# Altium PCB EST_MainV20.PcbDoc (part 2 of 7)
Units mil, origin at the board's own origin, x right, y up, seen from the top; angles counter-clockwise.
Board outline 2745 x 4540 mil, 2 copper layers (Top Layer, Bottom Layer); 326 components, 241 nets, 1052 pads, 399 vias.
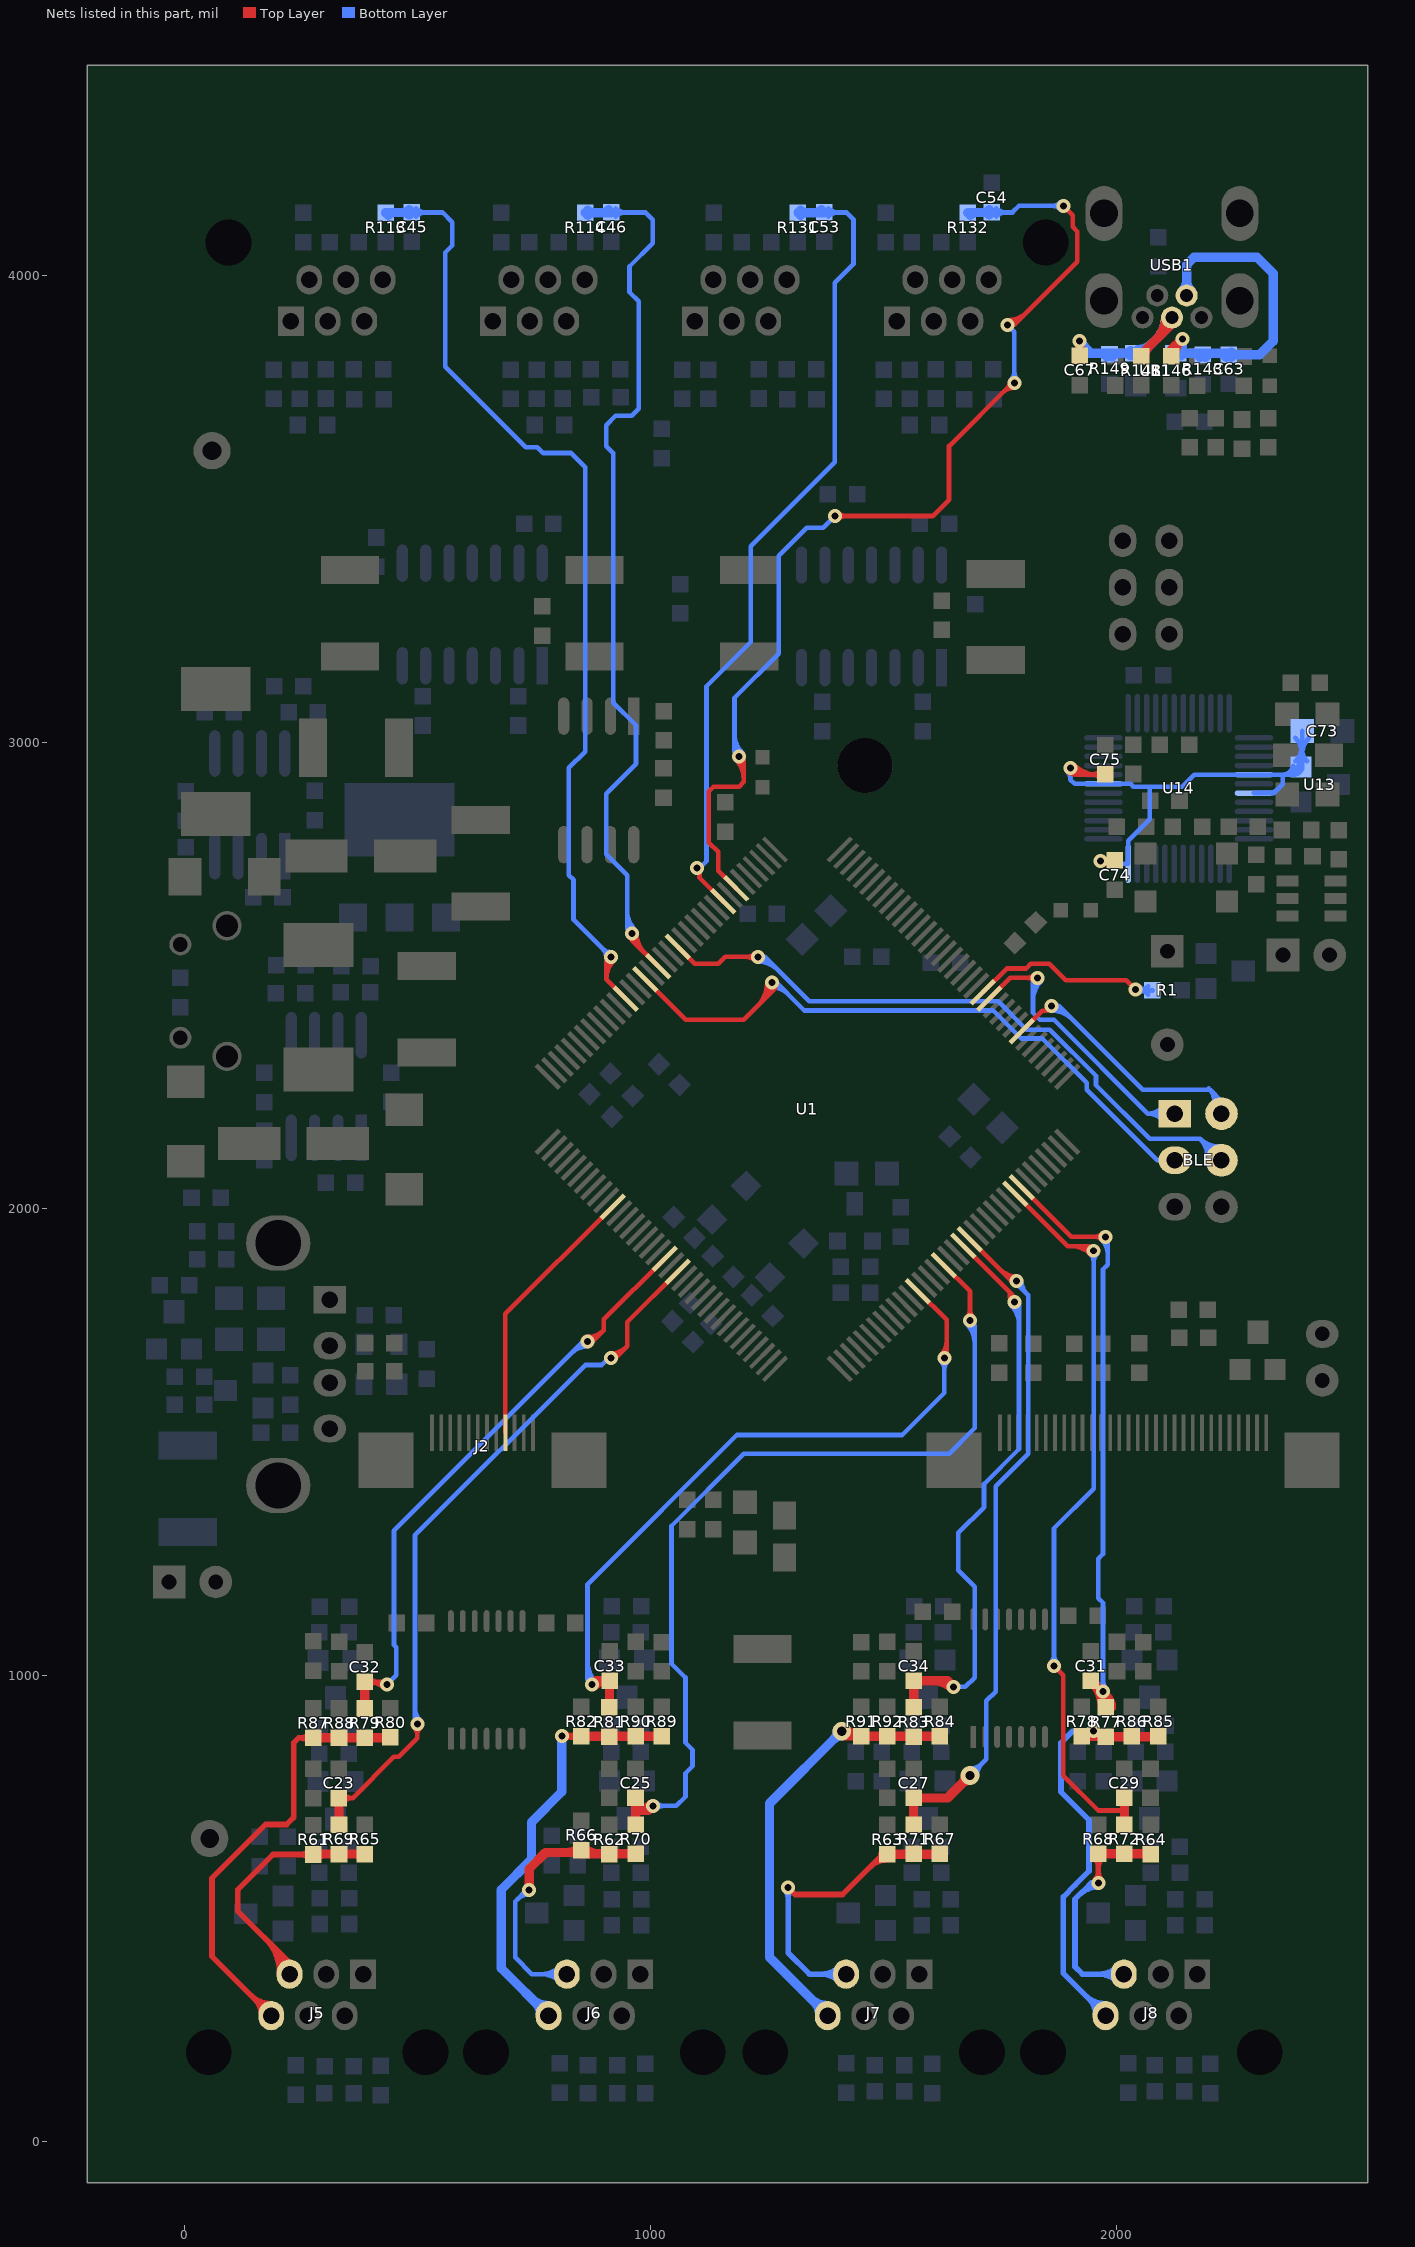
[diagram p2: the nets of this part, all layers, seen from the top]

## Via types
v1: diameter 30, hole 15, Top Layer to Bottom Layer, 237 vias
v2: diameter 50, hole 25, Top Layer to Bottom Layer, 93 vias
v3: diameter 40, hole 20, Top Layer to Bottom Layer, 68 vias
v4: diameter 60, hole 25, Top Layer to Bottom Layer, 1 vias

## Nets (pads, with @x,y where several pads share a name; then routed paths per layer and width w, separated by ;. In a path a pad name is that pad's centre, name@x,y a point inside that pad or via, vN(x,y) a via of type N, cw(c..) or ccw(c..) an arc to the next point about the centre after c; other vN are vias at no path point) (continued)
BELL: R1.2 U1.86 | length 586.1
  Top Layer w10: U1.86@1712.33,2463.91 1763.42,2515 1805,2515 1815,2525 1855,2525 1890,2490 2020,2490 v1(2040,2470)
  Bottom Layer w10: v1@2042.02,2467.98 R1.2@2076.01,2467.98 v1@2052.98,2467.98 ; R1.2@2065.24,2461.21 ccw(c2052.98,2453.5) v1@2052.98,2467.98 ; R1.2@2065.24,2474.76 cw(c2052.98,2482.47) v1@2052.98,2467.98 ; R1.2@2067.02,2458.99 ccw(c2045.31,2437.28) 2045.31,2467.98 ccw(c2045.31,2498.68) R1.2@2067.02,2476.98 ; v1@2047.07,2462.93 cw(c2059.28,2450.72) 2059.28,2467.98 ccw(c2059.28,2450.72) v1@2047.07,2462.93 ; v1@2047.07,2477.07 ccw(c2069.01,2499.01) 2069.01,2467.98 cw(c2069.01,2499.01) v1@2047.07,2477.07
BLE_IO1: BLE.2 U1.80 | length 731
  Top Layer w10: U1.80@1795.85,2380.4 1840.23,2424.77 1849.77,2424.77 v1(1860,2435)
  Bottom Layer w10: v1@1860,2425 cw(c1860,2364.64) 1902.68,2407.32 ; 1885.61,2424.39 ccw(c1860,2398.79) v1(1860,2435) 1875,2435 2055,2255 2200,2255 2224,2231 BLE.2@2224,2204 ; 2196.89,2258.11 cw(c2167.38,2228.6) BLE.2@2205.66,2211.97 ; 2207.28,2247.72 cw(c2181.86,2222.31) BLE.2@2214.83,2207.98
BLE_IO2: BLE.1 U1.85 | length 827.9
  Top Layer w10: U1.85@1726.25,2449.99 1771.26,2495 v1(1830,2495) ; v1@1822.93,2487.93 ccw(c1805.86,2470.86) 1805.86,2495 ccw(c1805.86,2519.14) v1@1822.93,2502.07
  Bottom Layer w10: 1820,2446.72 cw(c1878.28,2446.72) v1@1837.07,2487.93 ; 1820,2470.86 cw(c1854.14,2470.86) v1(1830,2495) 1820,2485 1820,2420 1835,2405 1865,2405 2066,2204 ; BLE.1@2099.72,2188.25 ccw(c2066,2160.02) 2066,2204 ; BLE.1@2099.72,2219.75 cw(c2066,2247.98) 2066,2204 ; BLE.1@2107.39,2194.67 ccw(c2087.42,2177.95) 2087.42,2204 ccw(c2087.42,2230.05) BLE.1@2107.39,2213.33 ; BLE.1@2124,2204 2066,2204
BLE_RX: BLE.4 U1.124 | length 1653.2
  Top Layer w10: U1.124@1058.12,2561.35 1094.47,2525 1145,2525 1160,2540 v1(1230,2540) ; v1@1222.93,2532.93 ccw(c1205.86,2515.86) 1205.86,2540 ccw(c1205.86,2564.14) v1@1222.93,2547.07
  Bottom Layer w10: v1@1230,2530 cw(c1230,2469.64) 1272.68,2512.32 ; 1255.61,2529.39 ccw(c1230,2503.79) v1(1230,2540) 1245,2540 1340,2445 1745,2445 1806,2384 1856,2384 1955,2285 1955,2265 2070,2150 2178,2150 ; BLE.4@2194.09,2106.36 ccw(c2138.74,2110.73) 2178,2150 ; BLE.4@2204.06,2105.57 ccw(c2167.16,2108.49) 2193.33,2134.67 ccw(c2219.51,2160.84) BLE.4@2222.43,2123.94 ; BLE.4@2221.64,2133.91 cw(c2217.27,2189.26) 2178,2150 ; BLE.4@2224,2104 2178,2150
BLE_TX: BLE.3 U1.129 | length 1557.7
  Top Layer w10: U1.129@988.52,2491.75 1075.28,2405 1200,2405 1260,2465 v1(1260,2485) cw(c1211.72,2485) 1245.86,2450.86 ; 1228.79,2433.79 ccw(c1177.57,2485) v1@1250,2485 ; 1262.93,2467.93 ccw(c1245.86,2485) v1@1270,2485
  Bottom Layer w10: v1@1260,2475 cw(c1260,2426.72) 1294.14,2460.86 ; v1(1260,2485) cw(c1260,2460.86) 1277.07,2477.93 ; v1@1260,2495 1330,2425 1735,2425 1795,2365 1840,2365 1935,2270 1935,2255 2086,2104 BLE.3@2124,2104
BLUE: J2.4 U1.11 | length 579.8
  Top Layer w10: J2.4@688.94,1520 688.94,1774.59 U1.11@918.93,2004.57
CVDD: C73.1 C74.2 C75.2 U13.1 U14.5 U14.7 U14.24 U14.31 | length 1647.5
  Top Layer w10: v1@1892.93,2937.93 ccw(c1909.36,2954.36) 1909.36,2931.12 ; v1@1907.07,2952.07 ccw(c1957.64,3002.64) C75.2@1957.64,2931.12 ; 1933.5,2931.12 cw(c1933.5,2978.5) v1(1900,2945) 1913.88,2931.12 C75.2@1975.16,2931.12 ; v1(1965,2745) v1@1966.88,2746.88 ; C75.2@1966.17,2922.13 ccw(c1944.46,2900.42) 1944.46,2931.12 ccw(c1944.46,2961.83) C75.2@1966.17,2940.12 ; v1@1972.07,2737.93 cw(c1993.67,2716.33) C74.2@1993.67,2746.88 ; v1@1972.07,2752.07 ccw(c1984.62,2764.62) C74.2@1984.62,2746.88 ; C74.2@1985.26,2738.52 ccw(c1966.88,2722.48) v1@1966.88,2746.88 ; C74.2@1985.26,2755.23 cw(c1966.88,2771.27) v1@1966.88,2746.88 ; C74.2@1994.84,2746.88 v1@1966.88,2746.88
  Bottom Layer w10: v1@1892.93,2937.93 cw(c1875.86,2920.86) 1900,2920.86 cw(c1924.14,2920.86) v1@1907.07,2937.93 ; v1(1900,2945) 1900,2920 1909.17,2910.83 U14.31@1970.91,2910.83 2029.17,2910.83 2035,2905 2070,2905 ; v1(1965,2745) 1970,2740 1975,2740 1975.43,2739.57 U14.24@2024.06,2739.57 2024.06,2789.06 2070,2835 2070,2905 ; v1@1972.07,2752.07 ccw(c2002.24,2782.24) 2002.24,2739.57 ; U14.7@2293.74,2891.15 2336.15,2891.15 2355,2910 2355,2930.52 ; U14.7@2329.17,2892.06 ccw(c2329.17,2911.08) 2342.63,2897.63 ; 2366.77,2930.52 ccw(c2366.77,2951.62) U13.1@2387.6,2948.21 ; U13.1@2377.73,2949.83 cw(c2355,2953.55) 2355,2930.52 ; U13.1@2378.54,2930.52 ccw(c2378.54,2949.7) U13.1@2397.47,2946.6 ; C73.1@2382.5,3009.5 cw(c2347.35,2974.35) 2397.05,2974.35 cw(c2446.76,2974.35) C73.1@2411.61,3009.5 ; U13.1@2382.63,2959.37 ccw(c2347.79,2994.21) 2397.06,2994.21 ; U13.1@2389.7,2952.3 ccw(c2371.93,2970.07) 2397.05,2970.07 ; 2397.05,2984.29 ccw(c2432.29,2984.29) U13.1@2407.37,2959.37 ; C73.1@2397.05,3024.06 2397.05,2949.06 U13.1@2395,2947 2378.52,2930.52 2355,2930.52 ; 2070,2905 2140,2905 2165.52,2930.52 U14.5@2293.74,2930.52 2355,2930.52
D+: C67.2 R148.2 R149.2 U11.2 USB1.3 | length 672.5
  Top Layer w20: C67.2@1914.39,3834.06 ccw(c1900.83,3847.62) v1@1920,3847.62 ; C67.2@1919.84,3828.61 1920,3828.76 v1(1920,3860) ; v1@1920,3846.86 ccw(c1938.09,3846.86) C67.2@1925.3,3834.06 ; R148.2@2052.02,3827.99 2052.02,3832.02 2117.87,3897.87 USB1.3@2117.87,3910.5 ; R148.2@2059.73,3827.99 cw(c2088.08,3827.99) 2068.03,3848.03 ; 2085.69,3865.69 ccw(c2040.88,3910.5) USB1.3@2104.25,3910.5
  Bottom Layer w20: 1920,3840.03 1928.16,3831.88 1930.28,3834 1945,3834 ; v1(1920,3860) 1920,3859 1945,3834 ; 1960.51,3834 cw(c1960.51,3808.52) R149.2@1978.53,3826.54 ; R149.2@1989.44,3826.54 cw(c2007.46,3808.52) 2007.46,3834 ; U11.2@2029.34,3828.34 ccw(c2015.69,3814.69) 2015.69,3834 ccw(c2015.69,3853.31) U11.2@2029.34,3839.66 ; U11.2@2045,3842 ccw(c2045,3883.04) 2074.02,3854.02 ; 2085.69,3865.69 ccw(c2040.88,3910.5) USB1.3@2104.25,3910.5 ; USB1.3@2117.87,3910.5 2117.87,3897.87 2054,3834 U11.2@2040,3834 1945,3834
D-: C63.1 R143.1 R146.2 U11.3 USB1.2 | length 992.6
  Top Layer w20: R146.2@2116.02,3827.99 2116.02,3841.02 v1(2140,3865) ; R146.2@2123.73,3827.99 cw(c2173.8,3827.99) v1@2138.4,3863.4
  Bottom Layer w20: U11.3@2126.7,3840.75 ccw(c2111.24,3865) v1(2140,3865) 2140,3848 U11.3@2126,3834 2236.96,3834 C63.1@2239.84,3831.12 2306.12,3831.12 2335,3860 2335,4005 2300,4040 2165,4040 2149.37,4024.37 USB1.2@2149.37,3957.74 ; U11.3@2134.5,3842.5 ccw(c2123.88,3853.12) v1@2135.97,3862.03 ; U11.3@2136.66,3828.34 cw(c2150.31,3814.69) 2150.31,3834 cw(c2150.31,3853.31) U11.3@2136.66,3839.66 ; USB1.2@2139.74,3967.38 ccw(c2116.48,3990.63) 2149.37,3990.63 ccw(c2182.26,3990.63) USB1.2@2159,3967.38 ; 2158.14,3834 cw(c2158.14,3805.13) R143.1@2178.56,3825.54 ; R143.1@2189.47,3825.54 cw(c2209.89,3805.13) 2209.89,3834 ; 2214.26,3834 cw(c2214.26,3805.53) C63.1@2234.39,3825.66 ; C63.1@2245.3,3825.66 cw(c2258.47,3812.49) 2258.47,3831.12 cw(c2258.47,3849.75) C63.1@2245.3,3836.57
DIGIA0: C23.1 R69.2 U1.21 | length 1774.5
  Top Layer w10: C23.1@332.03,737.03 C23.1@332.03,736.6 361.6,736.6 ; C23.1@341.26,727.86 cw(c361.6,708.58) 361.6,736.6 ; C23.1@341.26,745.35 ccw(c361.6,764.62) 361.6,736.6 ; v1@492.93,887.93 cw(c475.86,870.86) 500,870.86 cw(c524.14,870.86) v1@507.07,887.93 ; v1(500,895) 500,865 460,825 450,825 361.6,736.6 ; v1@915,1690 ccw(c915,1738.28) 949.14,1704.14 ; 932.07,1687.07 cw(c915,1704.14) v1(915,1680) 925,1680 950,1705 950,1757.26 U1.21@1058.12,1865.38
  Top Layer w20: C23.1@326.57,731.15 cw(c312.98,717.56) 332.2,717.56 ; R69.2@326.75,685.17 ccw(c313.57,698.34) 332.2,698.34 ccw(c350.83,698.34) R69.2@337.66,685.17 ; R69.2@332.2,679.71 C23.1@332.2,736.43 ; 332.2,718.39 cw(c350.24,718.39) C23.1@337.49,731.15
  Bottom Layer w10: 495,931.21 ccw(c536.21,931.21) v1@507.07,902.07 ; v1(500,895) 495,900 495,1300 860,1665 895,1665 910,1680 v1(915,1680)
DIGIA1: C32.2 R79.1 U1.19 | length 1563.5
  Top Layer w10: C32.2@387.35,985.85 429.16,985.85 v1(435,980) ccw(c420.89,965.89) 420.89,985.85 ; C32.2@396.34,976.85 cw(c418.05,955.14) 418.05,985.85 cw(c418.05,1016.55) C32.2@396.34,994.84 ; C32.2@396.75,985.85 cw(c396.75,941.75) v1@427.93,972.93 ; v1@865,1725 ccw(c865,1773.28) 899.14,1739.14 ; 882.07,1722.07 cw(c865,1739.14) v1(865,1715) 875,1715 900,1740 900,1762.94 U1.19@1030.28,1893.22
  Top Layer w20: R79.1@381.72,934.18 ccw(c368.54,947.35) 387.17,947.35 ccw(c405.8,947.35) R79.1@392.63,934.18 ; C32.2@381.89,980.39 cw(c369.13,967.63) 387.17,967.63 ; R79.1@387.17,928.72 C32.2@387.17,985.67 ; 387.17,966.8 cw(c406.39,966.8) C32.2@392.8,980.39
  Bottom Layer w10: v1(435,980) 455,1000 455,1060 450,1065 450,1310 855,1715 v1(865,1715) ; 830.86,1690.86 cw(c865,1656.72) v1@865,1705 ; 847.93,1707.93 cw(c865,1690.86) v1(865,1715) ; v1@875,1715 v1(865,1715)
DIGIAI0: J5.5 R61.2 R65.1 R69.1 | length 850.8
  Top Layer w12: 174.82,435.18 cw(c102.78,363.14) J5.5@204.66,363.14 ; 195.3,414.7 cw(c143.75,363.14) J5.5@216.66,363.14 ; 215.79,394.21 cw(c184.72,363.14) J5.5@228.66,363.14 ; J5.5@226.22,359.2 226.22,383.78 115,495 115,540 190.73,615.73 R61.2@277.17,615.73 ; R61.2@268.89,607.44 ccw(c248.89,587.44) 248.89,615.73 ccw(c248.89,644.01) R61.2@268.89,624.01
  Top Layer w20: R61.2@278.16,616.72 R69.1@332.2,616.72 R65.1@387.2,616.72 ; R61.2@282.63,610.27 cw(c298.2,594.7) 298.2,616.72 ; R69.1@326.75,611.26 ccw(c313.57,598.09) 313.57,616.72 ccw(c313.57,635.35) R69.1@326.75,622.18 ; R69.1@337.66,611.26 cw(c350.83,598.09) 350.83,616.72 cw(c350.83,635.35) R69.1@337.66,622.18 ; R65.1@381.75,611.26 ccw(c368.57,598.09) 368.57,616.72 ccw(c368.57,635.35) R65.1@381.75,622.18
DIGIAI1: J5.6 R79.2 R80.1 R87.1 R88.1 | length 1294.7
  Top Layer w12: 60,402.31 60,420 ; 60,560 60,545 ; 143.33,313.98 ccw(c186.85,357.51) J5.6@186.85,295.96 ; 152.83,304.48 cw(c122.75,274.4) J5.6@165.29,274.4 ; 163.81,293.5 ccw(c186.85,316.54) J5.6@186.85,283.96 ; J5.6@186.85,270.46 60,397.31 60,420 ; R87.1@268.94,857.44 ccw(c248.93,837.43) 248.93,865.72 ccw(c248.93,894.01) R87.1@268.94,874 ; R87.1@277.22,865.72 245.72,865.72 235,855 235,695 220,680 175,680 60,565 60,545 ; 60,420 60,490 60,545
  Top Layer w20: R87.1@277.22,865.72 R88.1@332.22,865.72 R80.1@441.2,865.72 ; R87.1@282.68,860.26 cw(c295.85,847.09) 295.85,865.72 cw(c295.85,884.35) R87.1@282.68,871.18 ; R88.1@326.76,860.26 ccw(c313.59,847.09) 313.59,865.72 ccw(c313.59,884.35) R88.1@326.76,871.18 ; R88.1@337.68,860.26 cw(c350.85,847.09) 350.85,865.72 cw(c350.85,884.35) R88.1@337.68,871.18 ; R79.2@381.72,860.27 ccw(c368.55,847.1) 368.54,865.73 ccw(c368.54,884.35) R79.2@381.71,871.18 ; R79.2@392.63,860.27 cw(c405.8,847.1) 405.8,865.73 cw(c405.8,884.35) R79.2@392.63,871.18 ; 421.16,865.72 ccw(c421.16,887.76) R80.1@436.75,872.18
DIGIB0: C25.1 R70.2 U1.53 | length 2225.9
  Top Layer w10: U1.53@1628.82,1879.3 1685,1823.11 v1(1685,1760) ; v1@1677.93,1767.07 ccw(c1660.86,1784.14) 1685,1784.14 ccw(c1709.14,1784.14) v1@1692.07,1767.07
  Top Layer w20: R70.2@962.56,685.45 ccw(c949.8,698.2) 967.84,698.2 ; R70.2@967.84,680.16 967.84,710 ; 967.84,699.04 ccw(c987.06,699.04) R70.2@973.47,685.45 ; C25.1@967.84,736.88 967.84,710 ; 968.79,710 ccw(c968.79,756.21) v1@1001.46,723.54 ; v1(1005,720) 995,710 967.84,710 ; C25.1@962.39,731.43 cw(c949.21,718.25) 967.84,718.25 ; C25.1@962.39,731.43 cw(c949.21,718.25) 967.84,718.25 ; C25.1@962.39,731.43 cw(c949.21,718.25) 967.84,718.25 ; C25.1@962.39,731.43 cw(c949.21,718.25) 967.84,718.25 ; 967.84,718.25 cw(c986.47,718.25) C25.1@973.3,731.43 ; 967.84,718.25 cw(c986.47,718.25) C25.1@973.3,731.43 ; 967.84,718.25 cw(c986.47,718.25) C25.1@973.3,731.43 ; 967.84,718.25 cw(c986.47,718.25) C25.1@973.3,731.43
  Bottom Layer w10: v1(1005,720) 1055,720 1075,740 1075,790 1090,805 1090,840 1075,855 1075,995 1045,1025 1045,1320 1200,1475 1640,1475 1695,1530 1695,1750 v1(1685,1760) cw(c1660.86,1735.86) 1695,1735.86 ; v1@1012.07,712.93 cw(c1029.14,695.86) 1029.14,720 cw(c1029.14,744.14) v1@1012.07,727.07 ; v1@1677.93,1752.93 cw(c1636.72,1711.72) 1695,1711.72
DIGIB1: C33.2 R81.1 U1.49 | length 1759.9
  Top Layer w10: U1.49@1573.14,1823.62 1635,1761.76 1635,1685 v1(1630,1680) ; v1@1622.93,1687.07 ccw(c1593.79,1716.21) 1635,1716.21
  Top Layer w20: v1(875,980) 883.12,988.12 C33.2@912.16,988.12 912.16,931.17 R81.1@911.98,931 ; v1@878.54,976.46 cw(c906.69,948.31) C33.2@906.69,988.12 ; R81.1@906.53,936.46 ccw(c892.94,950.05) 912.16,950.05 ; C33.2@906.7,993.58 cw(c893.53,1006.75) 893.53,988.12 cw(c893.53,969.5) 906.7,982.67 cw(c893.53,969.5) 912.16,969.5 cw(c930.79,969.5) C33.2@917.61,982.67 ; 912.16,949.21 ccw(c930.2,949.21) R81.1@917.44,936.46
  Bottom Layer w10: 865,1004.14 ccw(c899.14,1004.14) v1(875,980) 865,990 865,1195 1185,1515 1540,1515 1630,1605 v1(1630,1680) ; 865,1028.28 ccw(c923.28,1028.28) v1@882.07,987.07 ; v1@1622.93,1672.93 cw(c1605.86,1655.86) 1630,1655.86 cw(c1654.14,1655.86) v1@1637.07,1672.93
DIGIBI0: J6.5 R62.2 R66.1 R70.1 | length 871.9
  Top Layer w20: v1(740,540) 740,585 775,620 847.02,620 R66.1@852.02,625 ; 821.32,620 ccw(c821.32,655.7) R66.1@846.56,630.46 ; R66.1@856.02,617 R70.1@968.02,617 ; R66.1@857.47,630.46 ccw(c889.96,662.94) 889.96,617 ; 890.96,617 cw(c890.96,594.98) R62.2@906.53,610.55 ; R62.2@910.99,617 R62.2@911.98,616.01 ; R62.2@917.44,610.55 cw(c933.01,594.98) 933.01,617 ; R70.1@962.56,611.54 ccw(c949.39,598.37) 949.39,617 ccw(c949.39,635.63) R70.1@962.56,622.46
  Bottom Layer w10: 714.39,519.39 cw(c740,493.79) v1@740,530 ; 726.46,531.46 ccw(c717.93,540) v1@730,540 ; v1(740,540) 735,540 710,515 710,395 745.8,359.2 J6.5@820.71,359.2 ; J6.5@804.76,343.25 ccw(c766.25,304.74) 766.25,359.2 ccw(c766.25,413.66) J6.5@804.76,375.15 ; J6.5@811.83,350.32 ccw(c790.39,328.88) 790.39,359.2 ccw(c790.39,389.52) J6.5@811.83,368.08
DIGIBI1: J6.6 R81.2 R82.1 R89.1 R90.1 | length 1206.4
  Top Layer w14: v1(810,870) 811,869 825,869 ; v1@815.66,864.34 cw(c826.9,853.1) 826.9,869 ; v1@815.66,875.66 ccw(c831.73,891.73) 831.73,869 ; v1@819,869 825,869 ; R82.1@844.44,861.42 ccw(c826.14,843.13) 826.14,869 ccw(c826.14,894.87) R82.1@844.44,876.58 ; R82.1@852.02,869 825,869
  Top Layer w20: R82.1@852.02,869 R90.1@968.02,869 R89.1@1024.02,869 ; R82.1@857.47,863.54 cw(c870.65,850.37) 870.65,869 cw(c870.65,887.63) R82.1@857.47,874.46 ; 890.96,869 cw(c890.96,846.98) R81.2@906.53,862.55 ; R81.2@910.99,869 R81.2@911.98,868.01 ; R81.2@917.44,862.55 cw(c933.01,846.98) 933.01,869 ; R90.1@962.56,863.54 ccw(c949.39,850.37) 949.39,869 ccw(c949.39,887.63) R90.1@962.56,874.46 ; R90.1@973.47,863.54 cw(c986.65,850.37) 986.65,869 cw(c986.65,887.63) R90.1@973.47,874.46 ; R89.1@1018.56,863.54 ccw(c1005.39,850.37) 1005.39,869 ccw(c1005.39,887.63) R89.1@1018.56,874.46
  Bottom Layer w20: 744.64,307.16 ccw(c781.34,343.85) J6.6@781.34,291.96 ; 754.15,297.65 cw(c730.89,274.4) J6.6@763.78,274.4 ; J6.6@781.34,270.46 680,371.8 680,540 745,605 745,685 810,750 v1(810,870)
DIGIC0: C27.1 R71.2 U1.57 | length 1739.4
  Top Layer w10: U1.57@1684.49,1934.98 1774.47,1845 v1(1785,1845) cw(c1785,1870.42) 1767.02,1852.45 ; 1749.95,1869.52 ccw(c1785,1904.57) v1@1785,1855
  Top Layer w20: C27.1@1558.39,731.43 cw(c1545.21,718.25) 1563.84,718.25 cw(c1582.47,718.25) 1569.3,731.43 cw(c1582.47,718.25) 1582.47,736.88 cw(c1582.47,755.51) C27.1@1569.3,742.34 ; R71.2@1558.56,685.45 ccw(c1545.8,698.2) 1563.84,698.2 ; 1563.84,699.04 ccw(c1583.06,699.04) R71.2@1569.47,685.45 ; R71.2@1564.02,679.99 1563.84,680.16 C27.1@1563.84,736.88 1636.88,736.88 v3(1685,785) ; v3@1675,785 cw(c1650.86,785) 1667.93,767.93 cw(c1685,750.86) v3@1685,775
  Bottom Layer w10: v3(1685,785) 1720,820 1720,945 1740,965 1740,1405 1810,1475 1810,1815 v1@1780,1845 ; v3@1685,800 ccw(c1685,836.21) 1710.61,810.61 ccw(c1736.21,785) v3@1700,785 ; v1@1785,1835 cw(c1785,1822.93) 1793.54,1831.46 ; v1@1795,1845 ccw(c1831.21,1845) 1805.61,1819.39
DIGIC1: C34.2 R83.1 U1.56 | length 1475.9
  Top Layer w10: U1.56@1670.57,1921.06 1670.57,1920.57 1770.09,1821.06 1770.57,1821.06 ; v1@1775,1810 1775,1816.63 1770.57,1821.06 ; v1(1780,1800) 1770.57,1809.43 1770.57,1821.06
  Top Layer w20: R83.1@1558.53,936.46 ccw(c1545.35,949.63) 1563.98,949.63 ccw(c1582.61,949.63) R83.1@1569.44,936.46 ; C34.2@1558.7,982.67 cw(c1545.95,969.91) 1563.98,969.91 ; R83.1@1563.98,931 1563.98,987.95 C34.2@1564.16,988.12 1636.88,988.12 v1(1650,975) ; 1563.98,969.08 cw(c1583.2,969.08) 1569.61,982.67 cw(c1582.79,969.5) 1582.79,988.12 cw(c1582.79,1006.75) C34.2@1569.61,993.58 ; 1606.24,988.12 cw(c1606.24,931.24) v1@1646.46,971.46
  Bottom Layer w10: v1(1650,975) 1675,975 1695,995 1695,1190 1660,1225 1660,1305 1715,1360 1715,1410 1790,1485 1790,1795 v1@1775,1810 ; v1@1772.93,1792.93 cw(c1731.72,1751.72) 1790,1751.72 ; v1(1780,1800) cw(c1755.86,1775.86) 1790,1775.86
DIGICI0: J7.5 R63.2 R67.1 R71.1 | length 910.1
  Top Layer w12: v1(1295,545) 1310,530 1411.54,530 R63.2@1497.54,616.01 ; 1470.16,588.62 cw(c1507.98,550.8) R63.2@1507.98,604.29 ; R63.2@1490.64,609.11 cw(c1507.98,591.77) R63.2@1507.98,616.29
  Top Layer w20: R63.2@1497.54,616.01 R63.2@1507.98,616.01 1619.02,616.01 R67.1@1620.02,617 ; R63.2@1513.44,610.55 cw(c1526.61,597.38) 1526.61,616.01 cw(c1526.61,634.64) R63.2@1513.44,621.46 ; 1542.99,616.01 ccw(c1542.99,638.02) R71.1@1558.56,622.46 ; R71.1@1563.02,616.01 R71.1@1564.02,617 ; R71.1@1569.47,622.46 ccw(c1585.04,638.02) 1585.04,616.01 ; 1598.99,616.01 ccw(c1598.99,638.02) R67.1@1614.56,622.46
  Bottom Layer w12: v1@1288.64,538.64 cw(c1273.27,523.27) 1295,523.27 cw(c1316.73,523.27) v1@1301.36,538.64 ; v1(1295,545) 1295,405 1340.8,359.2 J7.5@1419.13,359.2 ; J7.5@1403.89,343.96 ccw(c1367.09,307.15) 1367.09,359.2 ccw(c1367.09,411.25) J7.5@1403.89,374.44
DIGICI1: J7.6 R83.2 R84.1 R91.1 R92.1 | length 1256.6
  Top Layer w20: v3@1405,880 1415,870 R91.1@1451.02,870 ; v3@1417.88,886.16 ccw(c1451.01,912.05) R91.1@1451.01,870 ; 1430.97,870 cw(c1430.97,847.96) R91.1@1446.56,863.54 ; R91.1@1457.47,863.54 cw(c1470.65,850.37) 1470.65,869 cw(c1470.65,887.63) R91.1@1457.47,874.46 ; R92.1@1502.56,863.54 ccw(c1489.39,850.37) 1489.39,869 ccw(c1489.39,887.63) R92.1@1502.56,874.46 ; R92.1@1513.47,863.54 cw(c1526.65,850.37) 1526.65,869 cw(c1526.65,887.63) R92.1@1513.47,874.46 ; 1542.96,869 cw(c1542.96,846.98) R83.2@1558.53,862.55 ; R83.2@1569.44,862.55 cw(c1585.01,846.98) 1585.01,869 ; R84.1@1614.56,863.54 ccw(c1601.39,850.37) 1601.39,869 ccw(c1601.39,887.63) R84.1@1614.56,874.46 ; R84.1@1620.02,869 R92.1@1508.02,869 R91.1@1452.02,869 R91.1@1451.02,870
  Bottom Layer w20: 1343.07,307.16 ccw(c1379.76,343.85) J7.6@1379.76,291.96 ; 1352.57,297.65 cw(c1329.32,274.4) J7.6@1362.2,274.4 ; J7.6@1379.76,270.46 1255,395.22 1255,725 v3(1410,880) ; v3@1400,880 cw(c1375.86,880) 1392.93,862.93 cw(c1410,845.86) v3@1410,870
DIGID0: C29.1 R72.2 U1.64 | length 1871.8
  Top Layer w10: U1.64@1781.93,2032.41 1894.34,1920 1940,1920 v1(1950,1910) ccw(c1925.86,1885.86) 1925.86,1920 ; v1(1865,1020) 1885,1000 1885,920 1885,785 1960,710 2016.02,710 ; 1901.72,1920 cw(c1901.72,1861.72) v1@1942.93,1902.93
  Top Layer w20: R72.2@2010.56,685.45 ccw(c1997.39,698.62) 2016.02,698.62 ccw(c2034.65,698.62) R72.2@2021.47,685.45 ; C29.1@2015.84,736.88 2016.02,736.71 2016.02,710 R72.2@2016.02,679.99 ; C29.1@2010.39,731.43 cw(c1996.8,717.84) 2016.02,717.84 ; C29.1@2010.39,731.43 cw(c1996.8,717.84) 2016.02,717.84 ; C29.1@2010.39,731.43 cw(c1996.8,717.84) 2016.02,717.84 ; 2016.02,718.67 cw(c2034.05,718.67) C29.1@2021.3,731.43 ; 2016.02,718.67 cw(c2034.05,718.67) C29.1@2021.3,731.43 ; 2016.02,718.67 cw(c2034.05,718.67) C29.1@2021.3,731.43
  Bottom Layer w10: v1@1857.93,1027.07 ccw(c1840.86,1044.14) 1865,1044.14 ccw(c1889.14,1044.14) v1@1872.07,1027.07 ; v1(1865,1020) 1865,1315 1950,1400 v1(1950,1910) ; v1@1942.93,1902.93 cw(c1925.86,1885.86) 1950,1885.86 cw(c1974.14,1885.86) v1@1957.07,1902.93
DIGID1: C31.2 R77.1 U1.65 | length 1584.6
  Top Layer w10: U1.65@1795.85,2046.33 1902.18,1940 v1(1975,1940) ; v1@1967.93,1932.93 ccw(c1950.86,1915.86) 1950.86,1940 ccw(c1950.86,1964.14) v1@1967.93,1947.07
  Top Layer w20: C31.2@1944.16,980.41 cw(c1944.16,961.78) 1957.33,974.95 cw(c1970.5,988.12) C31.2@1951.87,988.12 ; C31.2@1944.16,988.12 1975.98,956.3 R77.1@1975.98,931 ; C31.2@1944.92,987.36 cw(c1888.56,931) R77.1@1968.27,931 ; v1@1966.46,961.46 cw(c1943.48,938.48) R77.1@1975.98,938.48 ; R77.1@1970.53,936.46 ccw(c1957.35,949.63) 1975.98,949.63 ccw(c1994.61,949.63) R77.1@1981.44,936.46 ; v1@1979.06,953.22 cw(c1956.85,931) R77.1@1988.27,931
  Bottom Layer w10: v1@1962.93,972.07 ccw(c1945.86,989.14) 1970,989.14 ccw(c1994.14,989.14) v1@1977.07,972.07 ; v1@1965,970 v1(1970,965) 1970,1155 1960,1165 1960,1250 1970,1260 1970,1830 ; v1@1967.93,1932.93 cw(c1938.79,1903.79) 1980,1903.79 ; 1970,1845 1970,1830 ; v1(1975,1940) 1980,1935 1980,1880 1970,1870 1970,1830
DIGIDI0: J8.5 R64.2 R68.1 R72.1 | length 828.9
  Top Layer w12: R68.1@1951.73,608.72 cw(c1931.73,588.71) 1960.02,588.71 cw(c1988.3,588.71) R68.1@1968.3,608.72 ; v1@1953.64,561.36 ccw(c1938.23,576.77) 1960.02,576.77 ; v1(1960,555) R68.1@1960.02,617 ; 1960.02,576.69 ccw(c1981.69,576.69) v1@1966.36,561.36
  Top Layer w20: R68.1@1960.02,617 R72.1@2016.02,617 2070.99,617 R64.2@2071.98,616.01 ; R68.1@1965.47,611.54 cw(c1978.65,598.37) 1978.65,617 cw(c1978.65,635.63) R68.1@1965.47,622.46 ; R72.1@2010.56,611.54 ccw(c1997.39,598.37) 1997.39,617 ccw(c1997.39,635.63) R72.1@2010.56,622.46 ; R72.1@2021.47,611.54 cw(c2034.65,598.37) 2034.65,617 cw(c2034.65,635.63) R72.1@2021.47,622.46 ; 2050.96,617 cw(c2050.96,594.98) R64.2@2066.53,610.55
  Bottom Layer w12: 1919.03,529.03 cw(c1960,488.06) v1@1960,546 ; 1939.51,549.51 cw(c1960,529.03) v1@1960,558 ; v1(1960,555) 1945,555 1910,520 1910,375 1925.8,359.2 J8.5@2014.8,359.2 ; J8.5@1999.56,343.96 ccw(c1962.75,307.15) 1962.75,359.2 ccw(c1962.75,411.25) J8.5@1999.56,374.44
DIGIDI1: J8.6 R77.2 R78.1 R85.1 R86.1 | length 1177.4
  Top Layer w20: R78.1@1924.02,869 1974.99,869 R77.2@1975.98,868.01 2079.02,868.01 R85.1@2080.02,869 ; R78.1@1929.47,863.54 cw(c1942.65,850.37) 1942.65,869 cw(c1942.65,887.63) R78.1@1929.47,874.46 ; v1@1954.96,869 cw(c1954.96,846.98) R77.2@1970.53,862.55 ; R77.2@1966.99,869 R77.2@1967.98,868.01 ; R77.2@1981.44,862.55 cw(c1994.61,849.38) 1994.61,868.01 cw(c1994.61,886.64) R77.2@1981.44,873.46 ; 2010.99,868.01 ccw(c2010.99,890.02) R86.1@2026.56,874.46 ; R86.1@2037.47,874.46 ccw(c2053.04,890.02) 2053.04,868.01 ; 2066.99,868.01 ccw(c2066.99,890.02) R85.1@2082.56,874.46
  Bottom Layer w12: 1931.91,313.98 ccw(c1975.43,357.51) J8.6@1975.43,295.96 ; 1941.41,304.48 cw(c1911.33,274.4) J8.6@1953.87,274.4 ; v1@1943.64,873.64 ccw(c1928.27,858.27) 1928.27,880 ccw(c1928.27,901.73) v1@1943.64,886.36 ; v1(1950,880) 1905,880 1880,855 1880,750 1940,690 1940,580 1910,550 1885,525 1885,360.89 J8.6@1975.43,270.46 ; 1952.39,293.5 ccw(c1975.43,316.54) J8.6@1975.43,283.96
DIRA: C45.2 R113.1 U1.132 | length 2290.5
  Top Layer w10: 905,2491.72 cw(c963.28,2491.72) v1@922.07,2532.93 ; 905,2515.86 cw(c939.14,2515.86) v1(915,2540) 905,2530 905,2491.76 U1.132@946.77,2449.99
  Bottom Layer w10: C45.2@488.16,4135.88 554.12,4135.88 575,4115 575,4065 560,4050 560,3805 732.5,3632.5 757.5,3632.5 770,3620 830,3620 860,3590 860,3310 ; C45.2@497.15,4126.88 cw(c518.86,4105.17) 518.86,4135.88 cw(c518.86,4166.58) C45.2@497.15,4144.87 ; 860,3295 860,3310 ; v1@905,2540 ccw(c880.86,2540) 897.93,2557.07 ccw(c915,2574.14) v1@915,2550 ; v1(915,2540) 835,2620 835,2705 825,2715 825,2945 860,2980 860,3310
  Bottom Layer w20: R113.1@432.02,4135 432.89,4135.88 C45.2@488.16,4135.88 ; R113.1@437.47,4129.54 cw(c452.76,4114.26) 452.76,4135.88 ; C45.2@482.7,4130.42 ccw(c469.53,4117.25) 469.53,4135.88 ccw(c469.53,4154.5) C45.2@482.7,4141.33
DIRB: C46.2 R114.1 U1.127 | length 2172.8
  Top Layer w10: 969.93,2566.02 cw(c993.91,2590) v1(960,2590) 960,2575.95 U1.127@1016.36,2519.59 ; v1@970,2590 ccw(c1028.06,2590) 987,2548.95
  Bottom Layer w10: C46.2@916.16,4135.88 989.12,4135.88 1005,4120 1005,4070 955,4020 955,3965 975,3945 975,3715 960,3700 925,3700 905,3680 905,3635 920,3620 920,3590 920,3085 969,3036 969,2954 905,2890 905,2760 950,2715 950,2600 v1(960,2590) ; C46.2@925.15,4126.88 cw(c946.86,4105.17) 946.86,4135.88 cw(c946.86,4166.58) C46.2@925.15,4144.87 ; 950,2614.14 ccw(c984.14,2614.14) v1(960,2590) ; 950,2638.28 ccw(c1008.28,2638.28) v1@967.07,2597.07 ; v1@962.5,2587.5 v1(960,2590)
  Bottom Layer w20: R114.1@860.02,4135 915.28,4135 C46.2@916.16,4135.88 ; R114.1@865.47,4129.54 cw(c878.65,4116.37) 878.65,4135 cw(c878.65,4153.63) R114.1@865.47,4140.46 ; 895.42,4135 ccw(c895.42,4156.62) C46.2@910.7,4141.33
DIRC: C53.2 R131.1 U1.117 | length 1892.4
  Top Layer w10: v1@1105,2730 1105,2709.34 U1.117@1155.56,2658.78
  Bottom Layer w10: v1@1105,2730 1120,2745 1120,3120 1215,3215 1215,3420 1395,3600 1395,3665 ; C53.2@1372.16,4135.88 1420,4135.88 1435,4120.88 1435,4100 ; C53.2@1381.15,4126.88 cw(c1402.86,4105.17) 1402.86,4135.88 cw(c1402.86,4166.58) C53.2@1381.15,4144.87 ; 1395,3630 1395,3665 ; 1435,4118.88 1435,4100 ; 1395,3665 1395,3985 1435,4025 1435,4100
  Bottom Layer w20: R131.1@1316.02,4135 C53.2@1371.28,4135 ; R131.1@1321.47,4129.54 cw(c1334.65,4116.37) 1334.65,4135 cw(c1334.65,4153.63) R131.1@1321.47,4140.46 ; 1351.42,4135 ccw(c1351.42,4156.62) C53.2@1366.7,4141.33
  other v1: 1100,2730
DIRD: C54.2 R132.1 U1.115 | length 2717
  Top Layer w10: v1@1182.93,2962.93 cw(c1141.72,2921.72) 1200,2921.72 ; U1.115@1183.4,2686.62 1145,2725.02 1145,2765 1125,2785 1125,2895 1135,2905 1190,2905 1200,2915 1200,2960 v1(1190,2970) cw(c1165.86,2945.86) 1200,2945.86 ; v1(1395,3485) 1605,3485 1640,3520 1640,3635 1775,3770 v1(1780,3770) ; v1@1402.07,3477.93 cw(c1419.14,3460.86) 1419.14,3485 cw(c1419.14,3509.14) v1@1402.07,3492.07 ; 1754.39,3749.39 cw(c1780,3723.79) v1@1780,3760 ; v1@1765,3905 ccw(c1765,3965.36) 1807.68,3922.68 ; 1766.46,3761.46 ccw(c1757.93,3770) v1@1770,3770 ; 1790.61,3905.61 cw(c1765,3931.21) v1(1765,3895) 1780,3895 1915,4030 1915,4095 1905,4105 1905,4130 v1(1885,4150)
  Bottom Layer w10: 1180,2994.14 ccw(c1214.14,2994.14) v1(1190,2970) 1180,2980 1180,3095 1275,3190 1275,3400 1335,3460 1370,3460 v1(1395,3485) ; 1180,3018.28 ccw(c1238.28,3018.28) v1@1197.07,2977.07 ; C54.2@1736.16,4135.88 1775.88,4135.88 1790,4150 v1@1880,4150 ; C54.2@1740.83,4127.13 cw(c1761.94,4106.03) 1761.94,4135.88 ; C54.2@1740.83,4145.12 ccw(c1763.15,4167.43) 1763.15,4135.88 ; v1(1765,3895) 1780,3880 v1(1780,3770) ; v1@1772.93,3777.07 ccw(c1755.86,3794.14) 1780,3794.14 ccw(c1804.14,3794.14) v1@1787.07,3777.07 ; v1@1877.93,4142.93 ccw(c1860.86,4125.86) 1860.86,4150 ccw(c1860.86,4174.14) v1@1877.93,4157.07
  Bottom Layer w20: R132.1@1680.02,4135 1680.89,4135.88 C54.2@1736.16,4135.88 ; R132.1@1685.47,4129.54 cw(c1700.76,4114.26) 1700.76,4135.88 ; 1712.61,4135.88 ccw(c1712.61,4155.36) C54.2@1726.39,4141.58 ; 1713.82,4135.88 cw(c1713.82,4118.1) C54.2@1726.39,4130.67